# Altium PCB PocketLab_DMM_EVT0.PcbDoc (part 3 of 3)
Units mm, origin at the board's own origin, x right, y up, seen from the top; angles counter-clockwise.
Board outline 62 x 90 mm, 4 copper layers (Top Layer, GND, PWR_SIG, Bottom Layer), stack 1.04 mm thick; 103 components, 76 nets, 390 pads, 94 vias.
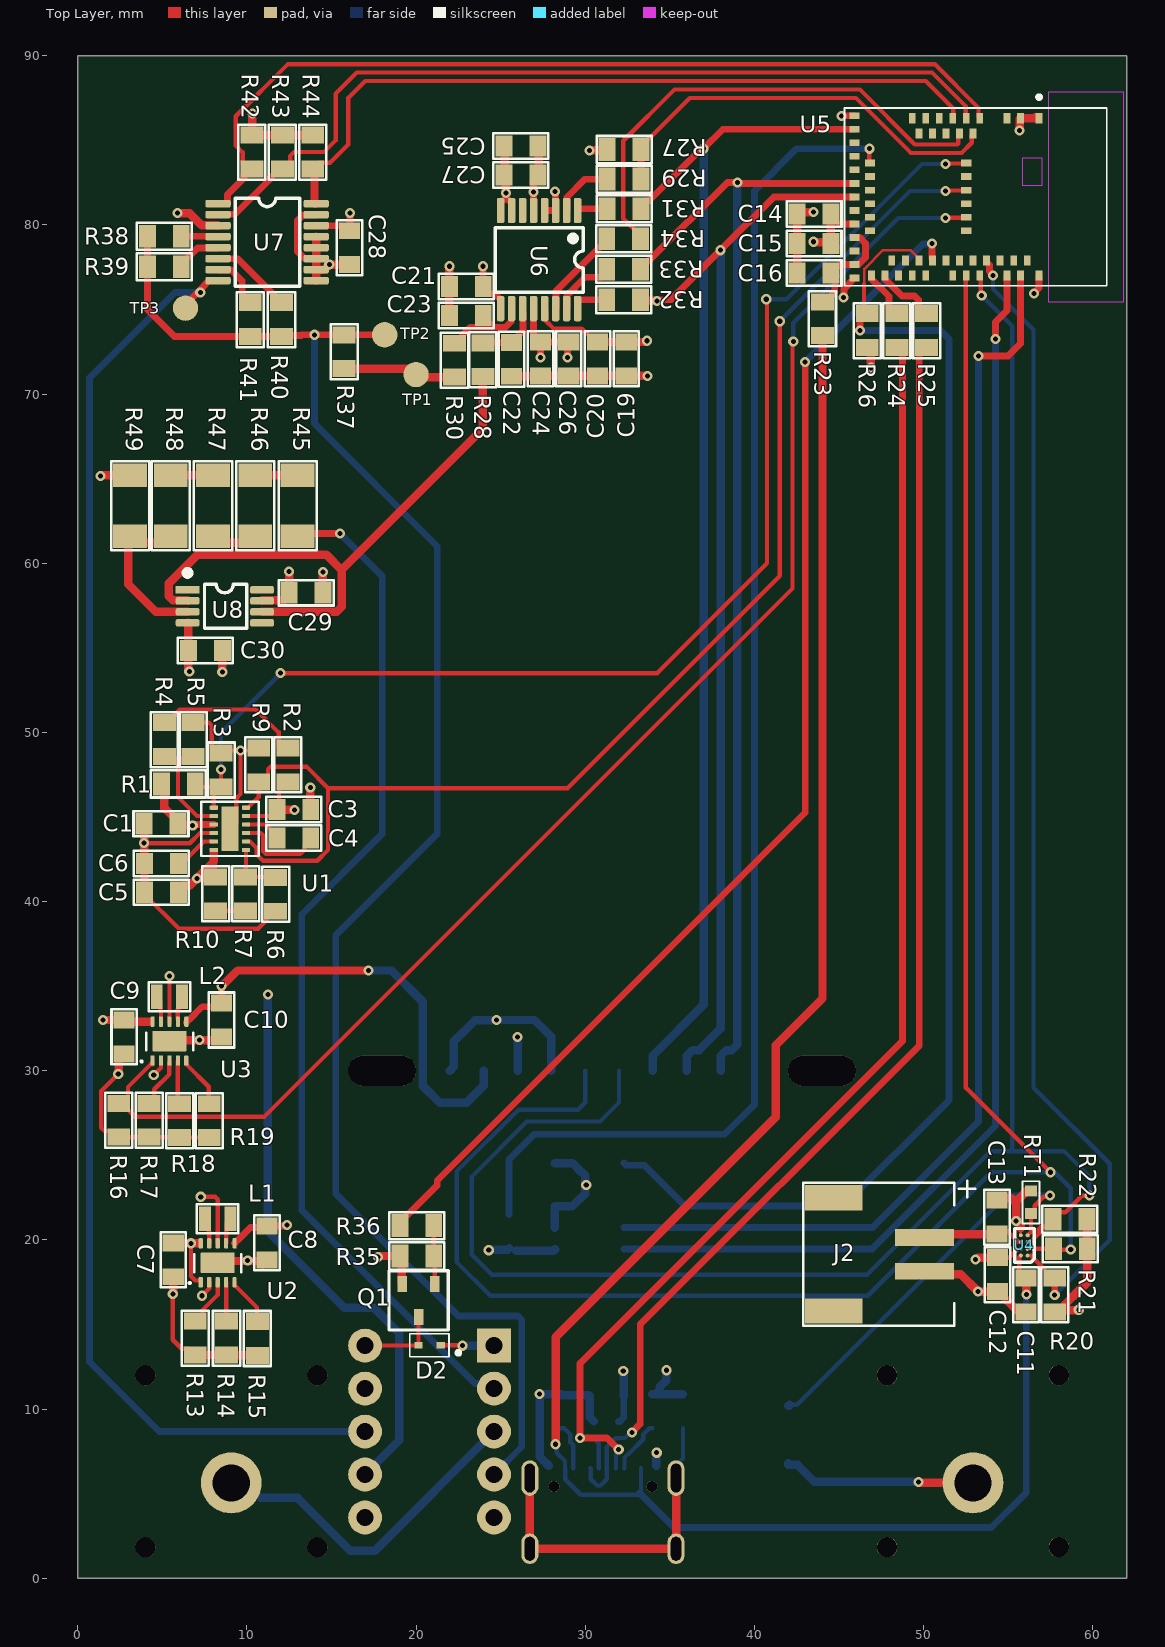
[diagram p0: Top Layer view]

## Via types
v1: diameter 0.6, hole 0.3, Top Layer to Bottom Layer, 94 vias

## Nets (pads, with @x,y where several pads share a name; then routed paths per layer and width w, separated by ;. In a path a pad name is that pad's centre, name@x,y a point inside that pad or via, vN(x,y) a via of type N, cw(c..) or ccw(c..) an arc to the next point about the centre after c; other vN are vias at no path point) (continued)
CHARGER_INT_N: R20.2 U4.A1 U5.49 | length 67.8
  Top Layer w0.15: U4.A1@56.125,19.1 U4.A1 56.154,19.071 56.35,19.071
  Top Layer w0.254: 56.35,19.071 56.802,18.619 56.802,18.623 57.125,18.3
  Top Layer w0.4: U5.49 53.725,77.8 53.9,77.625 53.9,77.254 54.1,77.054 v1(54.1,77) ; v1(57.75,16.75) R20.2
  Bottom Layer w0.254: v1(54.1,77) 54.1,76.2 56.5,73.8 56.5,29 61,24.5 61,20 v1(57.75,16.75)
GND: C1.2 C2.2 C3.1 C5.1 C6.1 C7.2 C8.1 C9.2 C10.1 C11.2 C12.2 C13.2 C14.2 C15.2 C16.2 C19.1 C20.1 C21.1 C22.2 C23.1 C24.1 C25.1 C26.1 C27.2 C28.1 C29.2 C30.2 D1.4 J1.A1 J1.A12 J1.B1 J1.B12 J2.2 J3.3 J3.5 J3.9 J5.1 J6.1 J6.4 Q1.2 R3.1 R5.1 R6.2 R8.2 R9.1 R11.1 R12.1 R13.2 R14.2 R15.2 R16.1 R17.2 R18.2 R19.2 R35.1 R42.1 R43.1 R44.1 R49.1 RT1.1 SW1.1 U1.4 U1.13 U2.2 U2.8 U2.11 U3.2 U3.8 U3.11 U4.D2 U5.1 U5.2 U5.15 U5.33 U5.55 U6.3 U6.4 U6.7 U6.8 U7.3 U7.9 U7.10 U7.11 U7.12 U7.13 U7.15 | length 167.6
  Top Layer w0.15: U4.D2 55.75,20.683
  Top Layer w0.254: v1(2.4,29.8) 1.4,28.8 1.4,26.625 1.585,26.44 2.06,26.44 R16.1 R17.2 6,26.075 R18.2 R19.2 ; C6.1@3.927,42.277 C6.1 ; v1(3.927,43.452) 6.627,43.452 7.227,44.052 U1.4 ; C5.1 3.952,40.427 5.977,38.402 10.677,38.402 11.154,38.879 11.154,39.054 11.527,39.427 R6.2 ; v1(4.5,29.75) 4.925,30.175 U3.2@4.925,30.55 ; U3.8@5.425,32.85 5.425,35.45 v1(5.425,35.6) ; v1(5.625,16.8) 5.625,14.1 6.152,13.573 6.577,13.573 R13.2 ; R5.1 7.752,50.577 7.929,50.4 7.929,49.15 8.302,48.777 R3.1 ; v1@7.275,22.4 v1(7.275,22.55) 8.125,22.55 8.275,22.4 U2.8 ; v1(7.35,16.7) 7.775,17.125 U2.2 ; R3.1@8.652,48.777 8.802,48.927 v1(9.627,48.927) ; U1.13 9.375,44.675 9.375,46.108 9.627,46.36 v1(9.627,48.927) ; R9.1@10.702,48.802 10.577,48.927 v1(9.627,48.927) ; C3.1@13.752,45.477 C3.1
  Top Layer w0.4: U7.11 14.075,78.025 13.4,78.025 13,78.425 13,80.254 13.321,80.575 14.075,80.575 U7.15 ; U6.8@25.025,81.319 v1@25.325,81.619 ; v1(25.325,81.875) v1@25.325,81.62 ; U6.7 25.625,81.32 v1@25.325,81.619 ; U6.4 U6.3 28.238,80.863 28.238,81.963 v1(28.225,81.975) ; v1(45.15,86.425) 45.175,86.45 U5.15 ; v1@45.294,75.719 45.294,76.219 U5.33 ; v1(56.525,75.95) 56.525,75.977 56.825,76.277 U5.55
  Top Layer w0.5: v1(1.35,65.15) 1.377,65.15 1.427,65.2 R49.1 ; v1(2.4,29.8) 2.419,29.819 2.419,30.625 2.445,30.625 2.695,30.875 C9.2@2.775,30.875 ; C6.1@3.927,42.277 v1(3.927,43.452) C1.2 ; C5.1 C6.1 ; U3.11@5.425,31.7 5.531,31.806 7.181,31.806 v1(7.2,31.825) 7.219,31.806 C10.1@7.894,31.806 ; v1@5.65,16.775 C7.2 ; v1(5.9,80.7) 5.919,80.681 6.617,80.681 7.322,79.975 8.275,79.975 U7.3 ; R13.2 R14.2 8.813,13.188 10.613,13.188 R15.2 ; U2.11 8.381,18.756 10.031,18.756 v1(10.05,18.775) 10.069,18.756 10.744,18.756 C8.1@10.975,18.525 ; v1(8.55,53.577) C30.2 ; v1(10.325,86.575) 10.313,86.563 10.313,85.313 R42.1 R44.1 ; C3.1@13.752,45.477 v1(13.752,46.752) ; U7.9 U7.10 ; U7.13 U7.12 U7.11 U7.10 ; C29.2 v1(14.5,59.485) ; C28.1 v1(14.875,77.65) 14.575,77.35 U7.10 ; v1(17.75,19) 17.777,19 17.827,19.05 R35.1 19.17,18.93 19.17,17.43 Q1.2 19.2,17.205 Q1.2@19.23,17.175 ; C23.1 C21.1 v1(21.975,77.55) ; C27.2@25.25,82.825 25.306,82.769 25.306,81.894 v1(25.325,81.875) ; C27.2@25.25,82.95 C25.1@25.25,84.65 ; C22.2 25.662,71.062 27.337,71.062 C24.1 C26.1 C20.1 C19.1 v1(33.675,71.075) ; C16.2 C15.2 C14.2 42.606,80.731 43.481,80.731 v1(43.5,80.75) ; v1(45.275,75.7) v1@45.294,75.719 ; v1(49.7,5.7) 49.76,5.64 J5.1 ; J2.2 50.218,17.982 52.193,17.982 v1@53.206,16.969 ; v1(53.225,16.95) C12.2 ; C13.2@54.21,22.47 55.18,22.47 55.425,22.225 55.475,22.275 ; C12.2@54.4,16.95 54.5,16.95 54.75,16.7 54.75,16.6 C11.2@55.637,15.712 ; v1(55.675,85.575) 55.694,85.594 55.694,86.269 U5.2 56.55,86.3 56.6,86.35 56.625,86.325 U5.1@56.625,86.3 ; 55.75,20.683 55.75,20.823 55.475,21.098 v1(55.475,21.125) 55.475,22.275 ; RT1.1 56.1,22.9 55.475,22.275
  Bottom Layer w0.5: J6.1 22.242,30.242 22.242,31.742 23.481,32.981 24.731,32.981 v1(24.75,33) 27,33 28,32 J6.4 ; J1.A12@27.675,6.825 27.3,7.2 v1(27.3,10.9) 27.312,10.888 28.562,10.888 R12.1 28.625,10.825 30.225,10.825 C2.2 30.275,9.51 30.495,9.29 D1.4 ; J1.A12@27.7,6.8 J1.A12@27.843,6.657 ; J3.3 J3.5 29.24,22 29.714,22.474 29.749,22.474 30.01,22.734 v1@30.01,23.27 ; J3.9 29.24,24.54 29.74,24.04 29.776,24.04 30.01,23.806 v1@30.01,23.27 ; v1(30.06,23.25) 30.03,23.25 v1@30.01,23.27 ; R11.1 R11.1@34.15,10.875 ; J1.B12@34.2,6.65 34.2,7.373 34.225,7.398 v1(34.225,7.425) ; v1(34.8,12.3) 34.781,12.281 34.781,11.681 34.4,11.3 34.4,11.125 R11.1@34.15,10.875 ; R8.2 R11.1@34.15,10.875 ; SW1.1 42,6.7 42.55,6.7 43.55,5.7 v1(49.7,5.7)
I2C_SCL: J6.5 R21.2 U4.B1 U5.46 | length 118.3
  Top Layer w0.254: U5.46 52.5,76.975 52.5,29 v1(57.5,24) ; U4.B1 56.158,19.483 57.667,19.483 R21.2 57.725,19.425 v1(58.7,19.425)
  Bottom Layer w0.254: J6.5 30,28.119 29.581,27.7 26.05,27.7 22.4,24.05 22.4,18.7 24.4,16.7 46.7,16.7 54,24 v1(57.5,24) 57.75,24 58.7,23.05 v1(58.7,19.425)
I2C_SDA: J6.6 R22.2 U4.C1 U5.48 | length 116.2
  Top Layer w0.15: U4.C1 56.165,19.89 56.336,19.89 56.35,19.904
  Top Layer w0.254: U5.48 53.38,76.945 53.38,75.87 v1(53.436,75.814) ; 56.35,19.904 56.8,20.354 56.8,20.626 56.949,20.775 57.277,20.775 R22.2@57.65,21.148 ; R22.2 57.65,21.259 58.023,21.632 58.382,21.632 59.36,22.61 59.785,22.61 v1(59.8,22.625)
  Bottom Layer w0.254: J6.6 32,28.119 30.881,27 26.55,27 23.3,23.75 23.3,19.125 24.475,17.95 46.675,17.95 53.975,25.25 55.25,25.25 ; v1(53.436,75.814) 55.25,74 55.25,25.25 ; 58.25,25.25 55.25,25.25 ; 58.3,25.25 59.8,23.75 v1(59.8,22.625)
MODE_RELAY_EN: R36.2 U5.42 | length 72.4
  Top Layer w0.4: R36.2 19.05,21.025 21.25,23.225 21.25,23.5 43,45.25 v1(43,71.9) ; v1(50.5,78.9) 50.5,78.025 50.525,78 U5.42
  Bottom Layer w0.4: v1(43,71.9) 49.962,78.862 50.462,78.862 v1(50.5,78.9)
MODULE_INT_N: J6.10 R50.1 U5.19 | length 81.8
  Top Layer w0.254: v1@46.788,84.462 46.788,83.688 U5.19
  Bottom Layer w0.4: R50.1 25.5,24.75 27,26.25 38.25,26.25 40,28 J6.10 40,82 42.5,84.5 v1(46.8,84.5)
MUX_RREF_A0: R42.2 U5.4 U7.1 | length 53.6
  Top Layer w0.254: R42.2 10.125,83.3 9.752,83.673 9.752,84.281 9.348,84.685 9.348,86.414 12.434,89.5 50.657,89.5 53.252,86.905 53.252,86.373 U5.4
  Top Layer w0.4: U7.1 8.825,81.25 8.85,81.275 8.85,81.8 9.825,82.775 9.825,83 R42.2@10.125,83.3
MUX_RREF_A1: R44.2 U5.8 U7.16 | length 45
  Top Layer w0.254: R44.2 14.273,83.673 14.923,83.673 16,84.75 16,87.5 17,88.5 50.127,88.5 51.75,86.877 51.75,86.325 U5.8
  Top Layer w0.5: R44.2@13.95,83.3 14,83.25 14,81.275 14.025,81.25 U7.16
MUX_RREF_EN: R43.2 U5.6 U7.2 | length 51.2
  Top Layer w0.254: R43.2@12.558,83.6 12.558,84.066 12.792,84.3 14.57,84.3 15.25,84.98 15.25,87.75 16.5,89 50.5,89 52.485,87.015 52.485,86.34 U5.6
  Top Layer w0.4: U7.2@8.275,80.625 9.295,80.625 11.325,82.655 11.325,82.7 11.925,83.3 12.258,83.3 R43.2@12.558,83.6
NetC4_1: C4.1 U1.10 | length 2.4
  Top Layer w0.254: U1.10 11.102,44.552 11.527,44.127 C4.1@11.527,43.527
NetC4_2: C4.2 U1.9 | length 5.5
  Top Layer w0.254: U1.9 10.828,44.052 10.977,43.903 10.977,42.961 11.126,42.812 13.162,42.812 13.404,43.054 13.404,43.379 C4.2
NetC6_2: C6.2 U1.5 | length 2.6
  Top Layer w0.254: C6.2 6.152,42.252 7.452,43.552 U1.5
NetC16_1: C16.1 R23.1 U5.30 U5.32 | length 6
  Top Layer w0.4: R23.1 44.2,75.45 44.625,75.875 44.625,75.969 44.744,76.088 44.744,76.931 C16.1 ; C16.1@44.525,77.275 44.825,77.575 44.984,77.575 45.059,77.65 U5.32 ; U5.30 46.23,79.25 46.575,78.905 46.575,78.075 U5.32@46.15,77.65
NetD2_2: D2.2 K1.10 Q1.3 | length 4.8
  Top Layer w0.254: K1.10 17,13.765 20.13,13.765 D2.2 20.145,13.78 20.145,15.445 Q1.3
  Bottom Layer w0.254: K1.10 16.995,13.755 K1.10@17,13.75
NetJ1_A5: J1.A5 R11.2 | length 3.2
  Bottom Layer w0.254: J1.A5 32.323,6.523 32.323,7.14 32.535,7.352 32.568,7.352 33.43,8.214 33.43,8.502 33.803,8.875 R11.2
NetJ1_B5: J1.B5 R12.2 | length 2.8
  Bottom Layer w0.254: R12.2 28.75,8.875 29.123,8.502 29.123,8.044 29.3,7.867 J1.B5
NetJ1_SHIELD1: J1.SHIELD1 J1.SHIELD2 J1.SHIELD3 J1.SHIELD4 R8.1 | length 20.1
  Top Layer w0.5: J1.SHIELD2 J1.SHIELD4 J1.SHIELD3 J1.SHIELD1
  Bottom Layer w0.254: J1.SHIELD1 35.37,6.677 35.775,7.082 R8.1
NetJ4_1: J4.1 K1.3 | length 20.4
  Bottom Layer w0.5: J4.1 9.11,5.64 10,4.75 10.297,5.047 10.512,5.047 10.809,4.75 13,4.75 16.125,1.625 17.56,1.625 K1.3
NetK1_2: K1.2 R45.1 | length 61.3
  Top Layer w0.4: R45.1 13.15,61.75 v1(15.5,61.75)
  Bottom Layer w0.4: v1(15.5,61.75) 18,59.25 18,44 13.25,39.25 13.25,21.75 23.479,11.521 24.304,11.521 K1.2
NetL1_1: L1.1 U2.9 | length 1.6
  Top Layer w0.254: L1.1 7.748,21.027 7.748,20.508 7.775,20.481 U2.9
NetL1_2: L1.2 U2.7 | length 1.6
  Top Layer w0.254: U2.7 8.775,20.503 8.802,20.53 8.802,21.027 L1.2
NetL2_1: L2.1 U3.9 | length 1.2
  Top Layer w0.254: L2.1@4.898,34.077 4.898,33.558 4.925,33.531 U3.9@4.925,32.85
NetL2_2: L2.2 U3.7 | length 1.3
  Top Layer w0.254: U3.7@5.925,33.073 5.925,33.628 5.952,33.655 5.952,34.077 L2.2@6.175,34.3
NetQ1_1: Q1.1 R35.2 R36.1 | length 3.5
  Top Layer w0.254: R36.1 R35.2 21.1,19 Q1.1
NetR2_1: R2.1 R4.2 | length 9.1
  Top Layer w0.254: R4.2 5.302,50.577 5.858,51.133 5.858,51.174 6.037,51.354 10.525,51.354 11.879,50 11.879,49.175 12.159,48.895 R2.1@12.412,48.895
NetR4_1: R4.1 R5.2 U1.2 | length 6.9
  Top Layer w0.254: R4.1@5.475,48.204 5.778,48.204 5.927,48.055 5.927,46.177 7.052,45.052 U1.2
  Top Layer w0.5: R4.1 5.377,48.327 6.577,48.327 R5.2
NetR6_1: R6.1 R7.2 U1.7 | length 3.3
  Top Layer w0.254: R7.2@9.652,41.677 9.952,41.977 U1.7 ; R7.2 R6.1@11.712,41.452
NetR7_1: R7.1 R10.2 | length 1.8
  Top Layer w0.254: R10.2@8.102,39.452 R7.1@9.877,39.452
NetR13_1: R13.1 U2.3 | length 3
  Top Layer w0.254: R13.1@6.925,15.125 7.009,15.125 7.382,15.498 7.382,15.857 8.273,16.748 8.273,17.498 U2.3
NetR14_1: R14.1 U2.4 | length 2.4
  Top Layer w0.254: R14.1@8.775,15.125 U2.4
NetR15_1: R15.1 U2.5 | length 2.9
  Top Layer w0.254: U2.5 9.275,17.329 10.6,16.004 R15.1@10.6,15.1
NetR17_1: R17.1 U3.3 | length 3
  Top Layer w0.254: R17.1@4.075,28.175 4.159,28.175 4.532,28.548 4.532,28.907 5.423,29.798 5.423,30.548 U3.3@5.425,30.55
NetR18_1: R18.1 U3.4 | length 2.4
  Top Layer w0.254: R18.1@5.925,28.175 U3.4@5.925,30.55
NetR19_1: R19.1 U3.5 | length 2.9
  Top Layer w0.254: U3.5@6.425,30.55 6.425,30.379 7.75,29.054 R19.1@7.75,28.15
NetR24_1: R24.1 U5.34 | length 3
  Top Layer w0.4: U5.34 46.925,76.805 47.95,75.78 47.95,75.05 48.25,74.75 R24.1
NetR25_1: R25.1 U5.35 | length 3.8
  Top Layer w0.4: U5.35 47.725,76.805 48.73,75.8 49.466,75.8 49.7,75.566 49.7,75.05 50,74.75 R25.1
NetR29_1: R29.1 U6.2 | length 3.6
  Top Layer w0.4: U6.2 28.925,80.875 28.925,81.629 29.996,82.7 R29.1
NetR31_1: R31.1 U6.1 | length 1.8
  Top Layer w0.4: U6.1 29.55,80.925 29.575,80.95 R31.1
NetR32_1: R32.1 U6.16 | length 2.2
  Top Layer w0.4: U6.16 29.55,75.55 29.575,75.575 R32.1
NetR33_1: R33.1 U6.15 | length 3.9
  Top Layer w0.4: U6.15 28.9,75.075 28.925,75.1 28.925,75.829 29.996,76.9 30.975,76.9 31.275,77.2 R33.1
NetR34_1: R34.1 U6.14 | length 5.4
  Top Layer w0.4: U6.14 28.275,75.075 28.275,76.095 30.88,78.7 30.975,78.7 31.275,79 R34.1
NetR38_2: R38.2 U7.4 | length 2.2
  Top Layer w0.4: R38.2 7.75,79.325 7.775,79.3 U7.4
NetR39_2: R39.2 U7.5 | length 2.7
  Top Layer w0.4: R39.2 6.125,77.7 6.725,78.3 6.77,78.3 7.095,78.625 8.225,78.625 U7.5@8.275,78.675
NetR40_2: R40.2 U7.6 | length 4.9
  Top Layer w0.4: U7.6 9.45,78 11.575,75.875 11.575,75.7 11.875,75.4 R40.2
NetR41_2: R41.2 U7.7 | length 3.3
  Top Layer w0.4: U7.7 8.325,77.325 9.079,77.325 9.725,76.679 9.725,75.7 10.025,75.4 R41.2
NetR45_2: R45.2 R46.1 | length 2.5
  Top Layer w0.5: R46.1 R45.2
NetR46_2: R46.2 R47.1 | length 2.5
  Top Layer w0.5: R47.1@8,61.2 R46.2@10.5,61.2
NetR47_2: R47.2 R48.1 | length 2.5
  Top Layer w0.5: R48.1 R47.2
NetRT1_2: RT1.2 SW1.2 U4.D1 | length 23.7
  Top Layer w0.254: U4.D1 56.35,20.475 RT1.2 56.375,21.55 56.573,21.748 56.573,22.023 57.109,22.559 57.409,22.559 v1(57.475,22.625)
  Bottom Layer w0.254: SW1.2@42.1,10.25 42.5,10.25 54.941,22.691 v1@57.464,22.691
  Bottom Layer w0.5: SW1.2 42.05,10.2 SW1.2@42.1,10.25
OHMS_ADC: R30.1 R37.2 TP1.1 | length 7.3
  Top Layer w0.254: TP1.1 TP1.1@20,71.25
  Top Layer w0.5: R37.2@16,71.25 R37.2 19.5,71.5 20,71 R30.1 ; TP1.1@19.9,71.25 TP1.1@20,71.25
OHMS_EXC_2V5: K1.8 TP3.1 U7.8 | length 89
  Top Layer w0.4: TP3.1 6.375,75.3 7.163,76.087 U7.8@7.775,76.7 ; v1(7.25,76) 7.288,76.038 7.288,76.213 U7.8@7.775,76.7 ; U7.8@7.775,76.7 U7.8 U7.8@7.775,76.7
  Bottom Layer w0.4: v1(7.25,76) 5.75,76 0.7,70.95 0.7,12.8 4.825,8.675 K1.8
OHMS_SENSE: K1.4 R37.1 R38.1 R39.1 R40.1 R41.1 TP2.1 | length 98.9
  Top Layer w0.4: R38.1 R39.1 4.125,75 5.725,73.4 R41.1 R40.1 12.112,73.462 13.212,73.462 13.25,73.5 R37.1 TP2.1@17.852,73.5
  Bottom Layer w0.4: v1@14,73.528 14,68.25 21.25,61 21.25,44 15.25,38 15.25,22.75 22.5,15.5 26.016,15.5 26.25,15.266 26.25,7.775 K1.4
  other v1: 14,73.5
RESET_N: J3.10 R26.1 U5.40 | length 80.9
  Top Layer w0.15: 46.5,76.5 46.5,77.393 47.607,78.5 49.225,78.5 U5.40@49.725,78
  Top Layer w0.254: R26.1@46.475,74.95 46.475,76.5
  Top Layer w0.4: v1(46.25,73.75) 46.25,74.45 46.55,74.75 R26.1
  Bottom Layer w0.4: J3.10 32.41,24.42 33.476,24.42 35.896,22 45.25,22 51.5,28.25 51.5,73.25 51,73.75 v1(46.25,73.75)
SPI_MISO: J6.9 R33.2 U5.22 | length 68
  Top Layer w0.4: R33.2 33.275,77.55 33.575,77.85 33.75,77.85 38.4,82.5 39.054,82.5 39.104,82.45 U5.22
  Bottom Layer w0.5: J6.9 38,30.873 38.346,31.219 38.676,31.219 39,31.543 v1(39,82.5)
SPI_MOSI: J6.8 R32.2 U5.24 | length 64.8
  Top Layer w0.4: v1@34.231,75.575 34.268,75.538 34.43,75.538 34.466,75.575 35.075,75.575 v1(38,78.5) 41.15,81.65 U5.24
  Top Layer w0.5: R32.2 33.331,75.519 34.231,75.519 v1(34.25,75.5)
  Bottom Layer w0.5: J6.8 36,30.873 36.346,31.219 36.729,31.219 38,32.49 v1(38,78.5)
SPI_SCLK: J6.7 R31.2 U5.16 | length 70.4
  Top Layer w0.4: R31.2 33.3,81.125 33.6,81.425 33.775,81.425 v1@36.925,84.575 ; v1(37,84.5) 38.15,85.65 U5.16
  Bottom Layer w0.5: J6.7 34,30.9 37,33.9 v1(37,84.5)
SWDCLK: J3.4 U5.53 | length 75.6
  Top Layer w0.4: v1(53.25,72.25) 55,72.25 55.725,72.975 U5.53
  Bottom Layer w0.4: J3.4 46.98,20.73 53.25,27 v1(53.25,72.25)
SWDIO: J3.2 U5.51 | length 75.5
  Top Layer w0.4: v1(54.25,73.25) 54.25,74.25 54.925,74.925 U5.51
  Bottom Layer w0.4: J3.2 46.96,19.46 54.25,26.75 v1(54.25,73.25)
SYS: C7.1 C9.1 C12.1 U2.1 U2.10 U3.10 U4.B2 | length 9.9
  Top Layer w0.15: 55.539,19.436 55.563,19.46 55.735,19.46 U4.B2
  Top Layer w0.254: v1(6.7,19.8) 6.7,17.85 6.948,17.602 7.273,17.602 7.275,17.6 U2.1 ; C12.1 55.054,18.95 55.539,19.436
  Top Layer w0.5: v1(1.5,33) C9.1 ; C9.1@2.75,32.9 4.225,32.9 ; C7.1 5.663,19.813 6.687,19.813 v1(6.7,19.8) 7.15,19.8 ; v1(53.075,18.848) 53.102,18.848 53.204,18.95 C12.1
USB_D+: D1.3 J1.A6 J1.B6 R25.2 | length 77.1
  Top Layer w0.4: v1(32.757,8.624) 33.25,9.117 33.25,15 49.75,31.5 49.75,72.45 50.05,72.75 R25.2
  Bottom Layer w0.254: J1.B6 30.323,6.477 30.323,5.86 30.695,5.488 30.905,5.488 31.277,5.86 31.277,7.068 31.275,7.07 31.275,7.76 31.79,8.275 D1.3 31.998,8.298 32.345,8.298 32.672,8.624 v1(32.757,8.624)
USB_D-: D1.5 J1.A7 J1.B7 R24.2 | length 79.1
  Top Layer w0.4: v1(31.979,7.611) 31.29,8.3 v1(29.7,8.3) 29.7,12.7 48.75,31.75 48.75,72.45 48.45,72.75 R24.2
  Bottom Layer w0.254: v1(29.7,8.3) 29.712,8.288 30.482,8.288 D1.5 30.68,8.275 30.703,8.252 30.703,8.067 30.8,7.97 J1.A7 ; J1.B7 31.823,6.523 31.823,7.362 31.979,7.518 v1(31.979,7.611)
USB_VBUS: C11.1 J1.A4 J1.A9 J1.B4 J1.B9 R23.2 U4.A2 | length 118.8
  Top Layer w0.254: C11.1@55.65,18.225 55.65,18.975 U4.A2
  Top Layer w0.5: v1(28.25,7.925) 28.25,14.25 41.25,27.25 41.25,31.5 44.025,34.275 R23.2 ; C11.1 56.062,17.738 56.062,16.788 v1(56.075,16.775)
  Bottom Layer w0.254: v1(28.25,7.925) 28.316,7.859 28.316,7.409 28.8,6.925 J1.B4 28.823,6.477 28.823,5.86 29.741,4.942 33.107,4.942 33.208,5.042 33.3,5.135 J1.B9
  Bottom Layer w0.4: 33.208,5.042 35.25,3 54,3 56.075,5.075 v1(56.075,16.775)
VBAT+: C13.1 J2.1 U4.C2 | length 6.2
  Top Layer w0.254: C13.1@54.225,20.7 54.771,20.7 55.596,19.875 U4.C2
  Top Layer w0.5: J2.1 50.25,20.35 C13.1
VSENSE_BUF: R28.1 U8.2 U8.6 | length 35.1
  Top Layer w0.5: U8.2 6.472,57.8 5.631,57.8 5.397,58.034 5.397,58.815 7.081,60.5 14.707,60.5 15.6,59.607 ; U8.6 15.307,57.125 15.6,57.418 15.6,59.607 ; R28.1 23.95,67.957 15.6,59.607
VSENSE_TAP: R48.2 R49.2 U8.3 | length 9.1
  Top Layer w0.5: R48.2@5.5,61.2 5.325,61.2 3,61.2 3,58.75 4.625,57.125 U8.3
pads on no net: D1.2 J1.A8 J1.B8 J1.MH1 J1.MH2 J2.M1 J2.M2 J3.6 J3.7 J3.8 J4.M1 J4.M2 J4.M3 J4.M4 J5.M1 J5.M2 J5.M3 J5.M4 J6.SLOT_L J6.SLOT_R K1.5 K1.6 K1.9 U5.3 U5.9 U5.10 U5.11 U5.12 U5.13 U5.14 U5.17 U5.18 U5.20 U5.21 U5.23 U5.25 U5.26 U5.27 U5.29 U5.31 U5.36 U5.37 U5.38 U5.39 U5.41 U5.43 U5.44 U5.45 U5.47 U5.50 U5.52 U5.54 U5.57 U5.59 U5.61 U6.6 U8.1 U8.5 U8.8

## Polygon pours and split planes (outlines as drawn)
3V3 on PWR_SIG "3V3_PLANE" (solid, pour order 4): 57,47.3 62,42.3 62,32 62,0 57.25,0 57.25,25.5 50.75,25.5 50.75,9.5 7.5,9.5 7.5,33.5 19.25,33.5 19.25,54.25 31.75,54.25 31.75,86.25 17.25,86.25 17.25,71.75 0.5,71.75 0,72.25 0,90 55.75,90 55.75,84.25 57,84.25
SYS on PWR_SIG "SYS_PLANE" (solid, pour order 1): 0,33.5 7.25,33.5 7.25,9.25 51,9.25 51,25.25 57,25.25 57,0 0,0
+2V5A on PWR_SIG "p2V5_PLANE" (solid, pour order 10): 28.5,80.25 28.5,86 31.5,86 31.5,54.5 19,54.5 19,33.75 9.5,33.75 9.5,63.25 9.75,63.5 22.25,63.5 22.25,80.25
-2V5A on PWR_SIG "n2V5_PLANE" (solid, pour order 9): 28.25,86 28.25,80.5 22,80.5 22,63.75 9.25,63.75 9.25,38.75 4.75,38.75 4.75,43.25 7.75,43.25 7.75,48.25 0,48.25 0,71.5 17.5,71.5 17.5,86
5V on PWR_SIG "5V_PLANE" (solid, pour order 2): 0,33.75 0,37.5 0,48 7.25,48 7.5,47.75 7.5,44 7,43.5 4.5,43.5 4.5,38.5 9.25,38.5 9.25,33.75
GND on GND "GND_PLANE" (solid, pour order 0): 62,42.8 57.25,47.55 57.25,84.25 56,84.25 56,86 57,86 57,90 0,90 0,0 62,0

## Silkscreen, mask and mechanical layers (free items; w line width, h text height)
Mechanical 1:
  lines w0.1: 2,0 64,0 ; 62,0 62,90
  lines w0.254: 17.5,32.1 17.5,69.1 ; 17.5,32.1 46.5,32.1 ; 17.5,32.1 17.5,69.1 ; 17.5,32.1 46.5,32.1 ; 17.5,69.1 46.5,69.1 ; 17.5,69.1 46.5,69.1 ; 46.5,32.1 46.5,69.1 ; 46.5,32.1 46.5,69.1

## Text inside footprints (layer, text, board x,y; h text height)
J1: Mechanical 1 "v PCB Edge v" at 36.906,-0.438 h1; Bottom Assembly "v PCB Edge v" at 36.906,-0.438 h1
J4: Mechanical 1 "PCB EDGE" at 4.998,28.64 h1 r180
J5: Mechanical 1 "PCB EDGE" at 48.838,28.64 h1 r180
U5: Top Assembly "No ground pad" at 59.05,84.451 h1 r270; Top Assembly "as wide as possible" at 54.729,89.778 h1; Top Assembly "as wide as possible" at 62.675,85.725 h1 r270; Bottom Assembly "Toplayer no ground pad" at 54.6,85.05 h1 r270